# Altium PCB PCB_Altium_OpenComs_ABP1_Front-panel_2023-05-12.pcbdoc
Units mm, origin at the board's own origin, x right, y up, seen from the top; angles counter-clockwise.
Board outline 108.07 x 53.65 mm, 2 copper layers (Top Layer, Bottom Layer); 36 components, 23 nets, 94 pads, 0 vias.
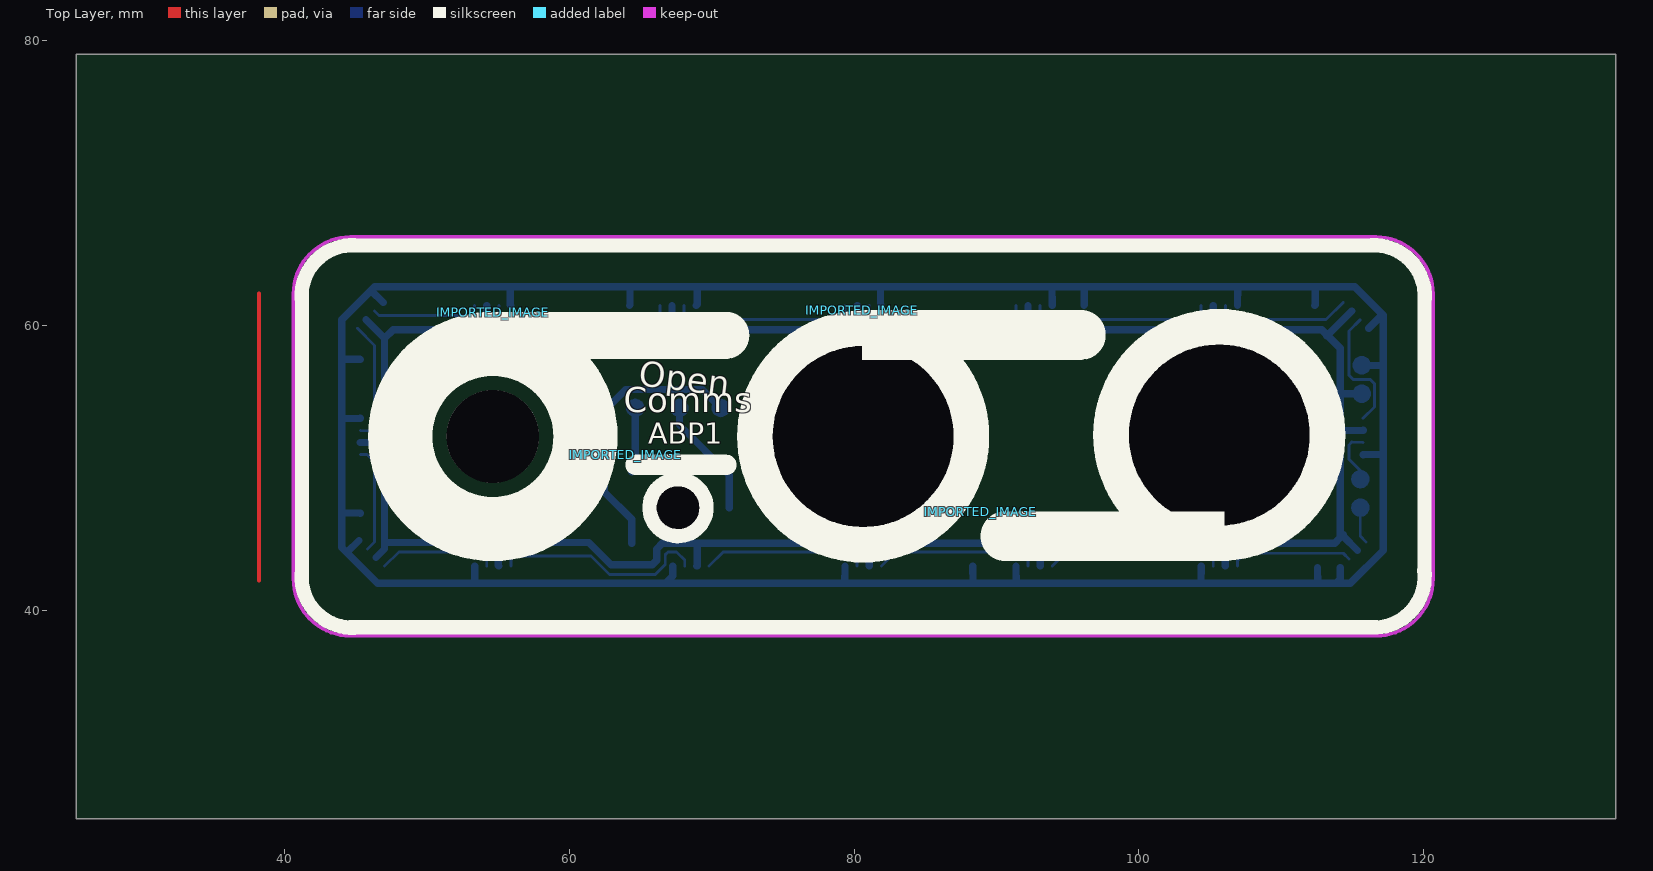
[diagram p0: Top Layer view]
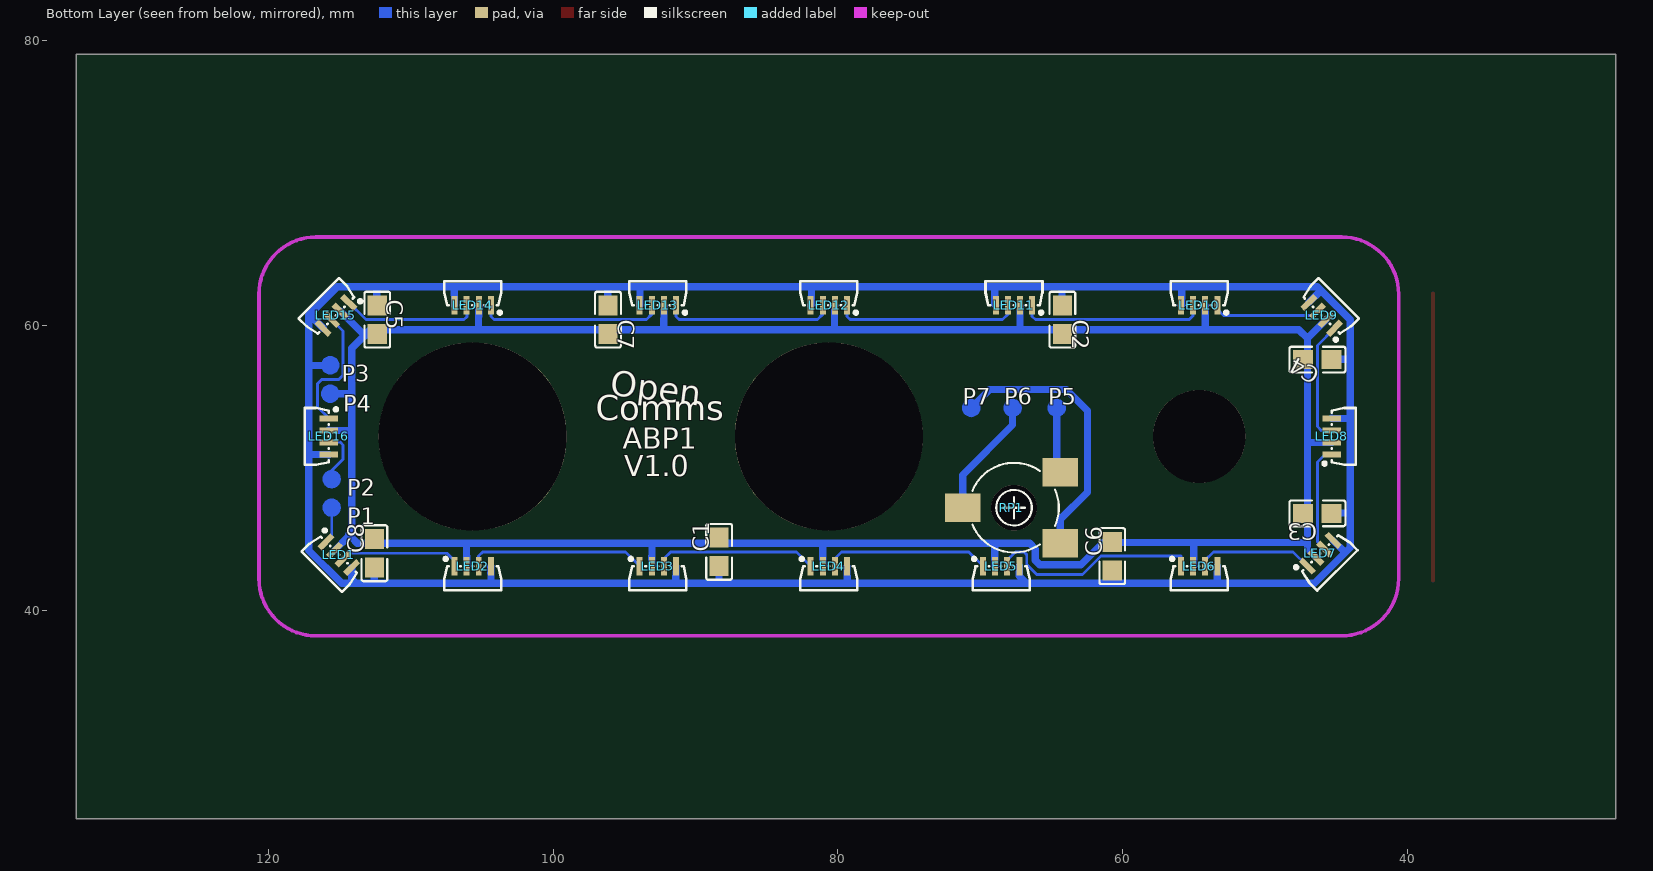
[diagram p1: Bottom Layer view, seen from below]

## Layer stack, top to bottom
Top Layer: signal copper (thickness not stored)
Dielectric: dielectric 0.32, FR-4, Dk 4.8
Bottom Layer: signal copper (thickness not stored)

## Board outline
133.467,25.4 25.4,25.4 25.4,79.054 133.467,79.054

## Components (designator, comment, footprint, x,y, rotation, side; value= is the part's Value field where it differs from the comment)
C1 "1u" C0805 88.34,44.127 r270 bottom
C2 "1u" C0805 64.24,60.427 r90 bottom
C3 "1u" C0805 46.34,46.827 r180 bottom
C4 "1u" C0805 46.34,57.627 r180 bottom
C5 "1u" C0805 112.34,60.427 r90 bottom
C6 "1u" C0805 60.74,43.827 r270 bottom
C7 "1u" C0805 96.14,60.427 r90 bottom
C8 "1u" C0805 112.54,44.027 r270 bottom
IMPORTED_IMAGE "IMPORTED_IMAGE" IMPORTED_IMAGE 63.966,50.927 r0 top
IMPORTED_IMAGE "IMPORTED_IMAGE" IMPORTED_IMAGE 54.653,60.963 r0 top
IMPORTED_IMAGE "IMPORTED_IMAGE" IMPORTED_IMAGE 88.897,46.958 r0 top
IMPORTED_IMAGE "IMPORTED_IMAGE" IMPORTED_IMAGE 80.566,61.087 r0 top
LED1 "WS2812B-4020" LED-SMD_WS2812B-4020 115.04,43.927 r225 bottom
LED2 "WS2812B-4020" LED-SMD_WS2812B-4020 105.64,43.127 r180 bottom
LED3 "WS2812B-4020" LED-SMD_WS2812B-4020 92.64,43.127 r180 bottom
LED4 "WS2812B-4020" LED-SMD_WS2812B-4020 80.64,43.127 r180 bottom
LED5 "WS2812B-4020" LED-SMD_WS2812B-4020 68.54,43.127 r180 bottom
LED6 "WS2812B-4020" LED-SMD_WS2812B-4020 54.64,43.127 r180 bottom
LED7 "WS2812B-4020" LED-SMD_WS2812B-4020 46.14,44.027 r135 bottom
LED8 "WS2812B-4020" LED-SMD_WS2812B-4020 45.34,52.227 r90 bottom
LED9 "WS2812B-4020" LED-SMD_WS2812B-4020 46.04,60.727 r45 bottom
LED10 "WS2812B-4020" LED-SMD_WS2812B-4020 54.64,61.427 r0 bottom
LED11 "WS2812B-4020" LED-SMD_WS2812B-4020 67.64,61.427 r0 bottom
LED12 "WS2812B-4020" LED-SMD_WS2812B-4020 80.64,61.427 r0 bottom
LED13 "WS2812B-4020" LED-SMD_WS2812B-4020 92.64,61.427 r0 bottom
LED14 "WS2812B-4020" LED-SMD_WS2812B-4020 105.64,61.427 r0 bottom
LED15 "WS2812B-4020" LED-SMD_WS2812B-4020 115.24,60.727 r315 bottom
LED16 "WS2812B-4020" LED-SMD_WS2812B-4020 115.74,52.227 r270 bottom
P1 "TESTPAD50" TESTPAD-50-ROUND 115.54,47.227 r0 bottom
P2 "TESTPAD50" TESTPAD-50-ROUND 115.54,49.227 r0 bottom
P3 "TESTPAD50" TESTPAD-50-ROUND 115.64,57.227 r0 bottom
P4 "TESTPAD50" TESTPAD-50-ROUND 115.64,55.227 r0 bottom
P5 "TESTPAD50" TESTPAD-50-ROUND 64.64,54.227 r0 bottom
P6 "TESTPAD50" TESTPAD-50-ROUND 67.74,54.227 r0 bottom
P7 "TESTPAD50" TESTPAD-50-ROUND 70.64,54.227 r0 bottom
RP1 "PS6KV50" PS6_POTMETER 67.64,47.227 r270 bottom

## Footprints (in the part's own frame and the unit in brackets; to place one, negate y for a bottom-side part, rotate by r counter-clockwise, add the part's x,y. Pads: shape width x height; smd on the part's side, far side on the other; paste and mask are expansions set on the pad)
C0805 [mm]
  rect 1.41x1.35 smd: 1(1,0) 2(-1,0)
  silkscreen extent -1.96,-0.9 1.96,0.9
IMPORTED_IMAGE [mm]
  silkscreen extent 0,-1.38 7.76,0
LED-SMD_WS2812B-4020 [mm]
  rect 0.42x1.3 smd: 1(-1.275,0) 2(-0.425,0) 3(0.425,0) 4(1.275,0)
  silkscreen extent -2,-1.7 2,0.6
PS6_POTMETER [mm]
  rect 2x2.5 smd: 1(2.5,3.25) 2(0,-3.6) 3(-2.5,3.25)
  silkscreen extent -3.15,-2.92 3.15,3.15
TESTPAD-50-ROUND [mm]
  round 0 smd: 1(0,0)
  Top Layer region: 0.635,0 0.63,-0.076 0.616,-0.152 0.594,-0.225 0.562,-0.295 0.522,-0.361 0.475,-0.421 0.421,-0.475 0.361,-0.522 0.295,-0.562 0.225,-0.594 0.152,-0.616 0.076,-0.63 0,-0.635 -0.076,-0.63 -0.152,-0.616 -0.225,-0.594 -0.295,-0.562 -0.361,-0.522 -0.421,-0.475 -0.475,-0.421 -0.522,-0.361 -0.562,-0.295 -0.594,-0.225 -0.616,-0.152 -0.63,-0.076 -0.635,0 -0.63,0.076 -0.616,0.152 -0.594,0.225 -0.562,0.295 -0.522,0.361 -0.475,0.421 -0.421,0.475 -0.361,0.522 -0.295,0.562 -0.225,0.594 -0.152,0.616 -0.076,0.63 0,0.635 0.076,0.63 0.152,0.616 0.225,0.594 0.295,0.562 0.361,0.522 0.421,0.475 0.475,0.421 0.522,0.361 0.562,0.295 0.594,0.225 0.616,0.152 0.63,0.076

## Free pads (board coordinates)
  round 6.5 hole 6.5 unplated: ""(54.64,52.227)
  round 3.2 hole 3.2 unplated: ""(67.64,47.227)
  round 13.2 hole 13.2 unplated: ""(80.64,52.227) ""(105.64,52.227)

## Nets (pads, with @x,y where several pads share a name; then routed paths per layer and width w, separated by ;. In a path a pad name is that pad's centre, name@x,y a point inside that pad or via, vN(x,y) a via of type N, cw(c..) or ccw(c..) an arc to the next point about the centre after c; other vN are vias at no path point)
+5V: C1.2 C2.2 C3.2 C4.2 C5.2 C6.2 C7.2 C8.2 LED1.2 LED2.2 LED3.2 LED4.2 LED5.2 LED6.2 LED7.2 LED8.2 LED9.2 LED10.2 LED11.2 LED12.2 LED13.2 LED14.2 LED15.2 LED16.2 P4.1 | length 193.7
  Bottom Layer w0.512: LED8.2 47.041,51.813 ; LED9.2 47.041,59.125 47.041,58.328 ; LED7.2@46.441,43.728 47.041,44.327 47.041,44.789 ; 54.215,59.727 LED10.2 ; 55.018,44.789 55.018,43.175 LED6.2 ; LED11.2 67.22,59.727 ; LED5.2 68.992,43.154 68.992,44.726 ; LED12.2 80.243,61.399 80.243,59.727 ; 81.058,44.726 LED4.2 ; LED13.2 92.224,59.727 ; 93.052,44.726 LED3.2 ; LED14.2 105.23,59.727 ; LED2.2 106.071,44.726 ; 113.193,59.274 LED15.2 ; 114.14,55.224 115.64,55.227 ; 114.341,45.328 114.341,45.227 LED1.2 ; 114.341,52.643 LED16.2@115.74,52.653 ; 47.041,44.789 61.378,44.789 62.94,43.227 65.84,43.227 66.14,43.527 66.14,44.328 66.538,44.726 113.739,44.726 114.14,45.127 114.14,58.427 112.84,59.727 81.349,59.727 47.64,59.727 47.041,59.128 47.041,44.789
FP_LED_DATA_IN: LED1.1 P1.1 | length 2.6
  Bottom Layer w0.2: P1.1 115.54,45.23 LED1.1
FP_LED_DATA_OUT: LED16.3 P2.1 | length 3.8
  Bottom Layer w0.2: P2.1 115.539,49.826 114.739,50.626 114.739,51.627 114.94,51.828 LED16.3
GND: C1.1 C2.1 C3.1 C4.1 C5.1 C6.1 C7.1 C8.1 LED1.4 LED2.4 LED3.4 LED4.4 LED5.4 LED6.4 LED7.4 LED8.4 LED9.4 LED10.4 LED11.4 LED12.4 LED13.4 LED14.4 LED15.4 LED16.4 P3.1 | length 213.3
  Bottom Layer w0.512: 44.041,46.856 45.311,46.856 C3.1 ; 44.041,53.494 LED8.4 ; 44.041,57.656 45.311,57.656 C4.1 ; 44.42,44.047 44.42,44.111 LED7.4 ; 46.07,62.457 46.113,62.457 LED9.4 ; 48.64,41.927 113.84,41.927 ; 48.641,41.927 46.54,41.927 44.041,44.426 44.041,60.428 46.34,62.727 115.14,62.727 117.14,60.727 ; LED6.4 53.375,41.927 ; 55.869,62.727 55.869,61.473 LED10.4 ; C2.1 64.269,61.456 64.269,62.726 ; 66.764,41.927 67.265,42.427 LED5.4 ; LED11.4 68.98,61.493 68.98,62.727 ; 79.356,41.927 LED4.4 ; 81.858,62.727 81.858,61.484 LED12.4 ; C1.1 88.343,41.927 ; LED3.4 91.384,41.927 ; 93.901,62.727 LED13.4 ; C7.1 96.169,61.456 96.169,62.726 ; 104.356,41.927 LED2.4 ; LED14.4 106.931,62.727 ; C5.1 112.369,61.456 112.369,62.726 ; C8.1 112.557,41.927 ; LED1.4@114.137,43.027 114.14,42.227 113.84,41.927 ; 115.64,57.227 117.14,57.203 ; LED16.4 117.14,50.972 ; LED15.4 117.044,60.728 117.14,60.728 ; 113.84,41.927 114.84,41.927 117.14,44.227 117.14,60.727
LED2_1: LED1.3 LED2.1 | length 8.6
  Bottom Layer w0.2: LED2.1@106.915,43.127 106.915,43.502 107.44,44.027 114.339,44.027 LED1.3
LED3_1: LED2.3 LED3.1 | length 12.6
  Bottom Layer w0.2: LED3.1 94.915,44.127 104.94,44.127 105.24,43.827 LED2.3
LED4_1: LED3.3 LED4.1 | length 11.4
  Bottom Layer w0.2: LED4.1 82.915,44.127 91.74,44.127 92.215,43.652 LED3.3
LED5_1: LED4.3 LED5.1 | length 11.5
  Bottom Layer w0.2: LED5.1 70.815,44.127 79.74,44.127 80.215,43.652 LED4.3
LED6_1: LED5.3 LED6.1 | length 15.2
  Bottom Layer w0.2: LED6.1@55.916,43.128 55.916,43.827 61.54,43.827 62.84,42.527 66.04,42.527 66.741,43.228 66.741,43.926 66.939,44.126 67.541,44.126 68.115,43.552 LED5.3
LED7_1: LED6.3 LED7.1 | length 8.3
  Bottom Layer w0.2: LED7.1@47.042,43.125 48.043,44.127 53.64,44.127 54.215,43.552 LED6.3@54.215,43.127
LED8_1: LED7.3 LED8.1 | length 7.5
  Bottom Layer w0.2: LED8.1 45.815,50.952 46.34,50.427 46.34,44.828 LED7.3
LED9_1: LED8.3 LED9.1 | length 8.5
  Bottom Layer w0.2: LED9.1 46.34,58.624 46.34,52.927 46.04,52.627 LED8.3
LED10_1: LED9.3 LED10.1 | length 7.6
  Bottom Layer w0.2: LED9.3 46.641,60.727 52.94,60.727 53.365,61.152 LED10.1
LED11_1: LED10.3 LED11.1 | length 13
  Bottom Layer w0.2: LED10.3 55.065,60.702 55.34,60.427 66.14,60.427 66.365,60.652 LED11.1
LED12_1: LED11.3 LED12.1 | length 12.9
  Bottom Layer w0.2: LED11.3 68.065,60.802 68.44,60.427 79.14,60.427 79.365,60.652 LED12.1
LED13_1: LED12.3 LED13.1 | length 11.9
  Bottom Layer w0.2: LED12.3 81.065,60.802 81.44,60.427 91.14,60.427 91.365,60.652 LED13.1
LED14_1: LED13.3 LED14.1 | length 12.9
  Bottom Layer w0.2: LED13.3 93.065,60.802 93.44,60.427 104.14,60.427 104.365,60.652 LED14.1@104.365,61.427
LED15_1: LED14.3 LED15.1 | length 9.7
  Bottom Layer w0.2: LED14.3 106.04,60.627 106.24,60.427 113.137,60.427 LED15.1
LED16_1: LED15.3 LED16.1 | length 9
  Bottom Layer w0.2: LED15.3 114.739,59.626 114.739,56.527 115.039,56.227 116.241,56.227 116.54,55.927 116.54,54.302 LED16.1
P5_1: P5.1 RP1.3 | length 4.6
  Bottom Layer w0.512: RP1.3 64.64,49.977 P5.1
P6_1: P6.1 RP1.2 | length 8.4
  Bottom Layer w0.512: P6.1 67.74,53.027 71.24,49.527 RP1.2
P7_1: P7.1 RP1.1 | length 19.4
  Bottom Layer w0.512: RP1.1 64.389,46.415 62.484,48.32 62.484,54.035 63.975,55.526 69.339,55.526 70.64,54.228
S$7667:  | length 20.2
  Top Layer w0.254: 38.227,42.097 38.227,62.29

## Keep-outs
Keep-Out Layer:
  lines w0.254: 40.64,42.227 ccw(c44.64,42.227) 44.64,38.227 ; 40.64,62.227 cw(c44.64,62.227) 44.64,66.227 ; 116.64,38.227 ccw(c116.64,42.227) 120.64,42.227 ; 116.64,66.227 cw(c116.64,62.227) 120.64,62.227

## Silkscreen, mask and mechanical layers (free items; w line width, h text height)
Top Overlay:
  circle w1: c67.64,47.227 r2
  circle w4.5: c54.64,52.227 r6.5
  circle w2.5: c105.64,52.327 r7.6
  circle w2.5: c80.64,52.227 r7.6
  lines w1: 41.24,42.227 41.24,62.227 ; 41.24,42.827 ccw(c44.788,42.375) 45.24,38.827 ; 41.24,61.627 cw(c44.788,62.079) 45.24,65.627 ; 44.64,38.827 116.64,38.827 ; 44.64,65.627 116.64,65.627 ; 116.032,38.835 ccw(c116.483,42.384) 120.032,42.835 ; 116.04,65.627 cw(c116.492,62.079) 120.04,61.627 ; 120.04,42.227 120.04,62.227
  text "Open" at 64.74,55.227 h3 r353
  text "Comms" at 63.84,53.327 h3
  text "ABP1" at 65.54,51.227 h2.5
Bottom Overlay:
  text "Open" at 96.139,54.543 h3 r7
  text "Comms" at 97.017,52.77 h3
  text "ABP1" at 95.123,50.86 h2.5
  text "V1.0" at 94.996,48.955 h2.5
Top Solder:
  lines w2.5: 42.482,44.446 ccw(c46.104,44.068) 46.482,40.446 ; 42.504,44.404 ccw(c45.306,43.206) 46.504,40.404 ; 42.54,42.227 42.54,62.227 ; 44.54,40.427 116.54,40.427 ; 44.64,64.227 116.64,64.227 ; 114.74,40.227 ccw(c115.938,43.029) 118.74,44.227 ; 114.772,64.223 cw(c115.149,60.6) 118.772,60.223 ; 114.808,64.195 cw(c116.006,61.393) 118.808,60.195 ; 118.722,42.173 118.722,62.173 ; 42.54,60.227 cw(c45.342,61.425) 46.54,64.227 ; 42.54,60.227 cw(c46.162,60.604) 46.54,64.227 ; 42.54,60.227 cw(c46.162,60.604) 46.54,64.227 ; 114.73,40.237 ccw(c115.108,43.859) 118.73,44.237 cw(c115.108,43.859) 114.73,40.237
Bottom Solder:
  lines w2.5: 42.468,44.432 ccw(c45.27,43.234) 46.468,40.432 ; 42.482,44.446 ccw(c46.104,44.068) 46.482,40.446 ; 42.54,42.227 42.54,62.227 ; 42.563,60.204 cw(c45.364,61.403) 46.563,64.204 ; 44.54,40.427 116.54,40.427 ; 44.64,64.227 116.64,64.227 ; 114.74,40.227 ccw(c115.938,43.029) 118.74,44.227 ; 114.808,64.195 cw(c115.186,60.573) 118.808,60.195 ; 114.844,64.167 cw(c116.043,61.366) 118.844,60.167 ; 118.722,42.173 118.722,62.173